# Altium PCB Dental Sensor - V200.PcbDoc
Units mm, origin at the board's own origin, x right, y up, seen from the top; angles counter-clockwise.
Board outline 58.04 x 14.5 mm, 2 copper layers (Top Layer, Bottom Layer), stack 0.287 mm thick; 21 components, 25 nets, 123 pads, 99 vias.
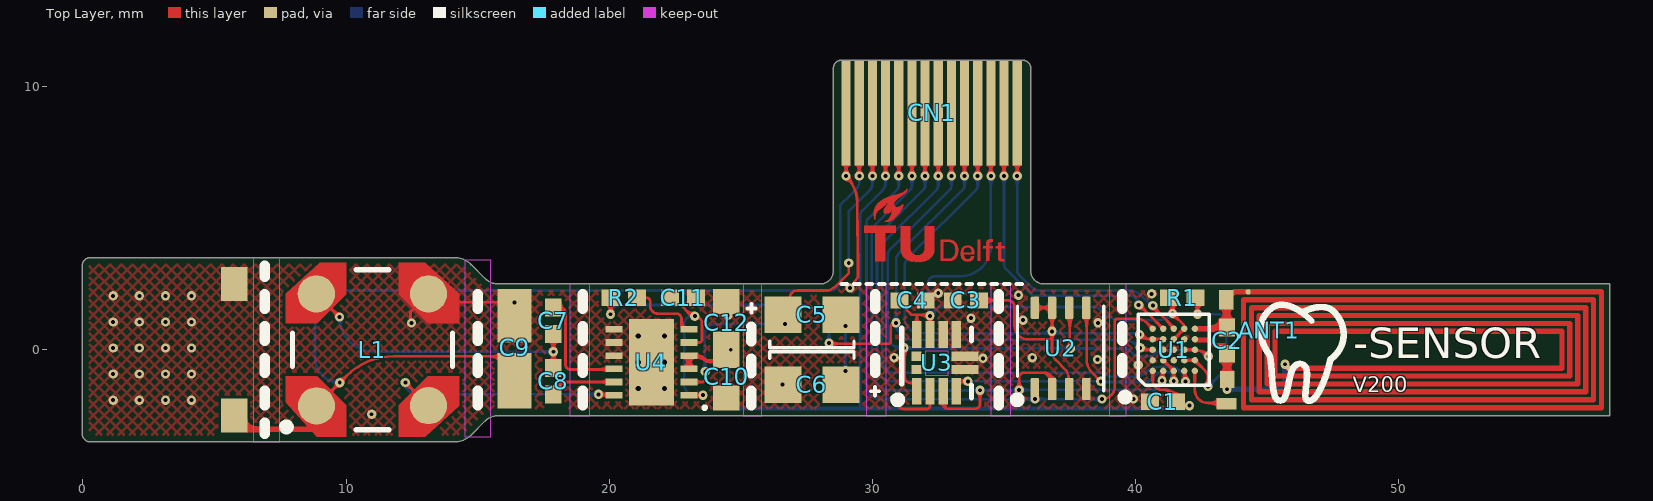
[diagram p0: Top Layer view]
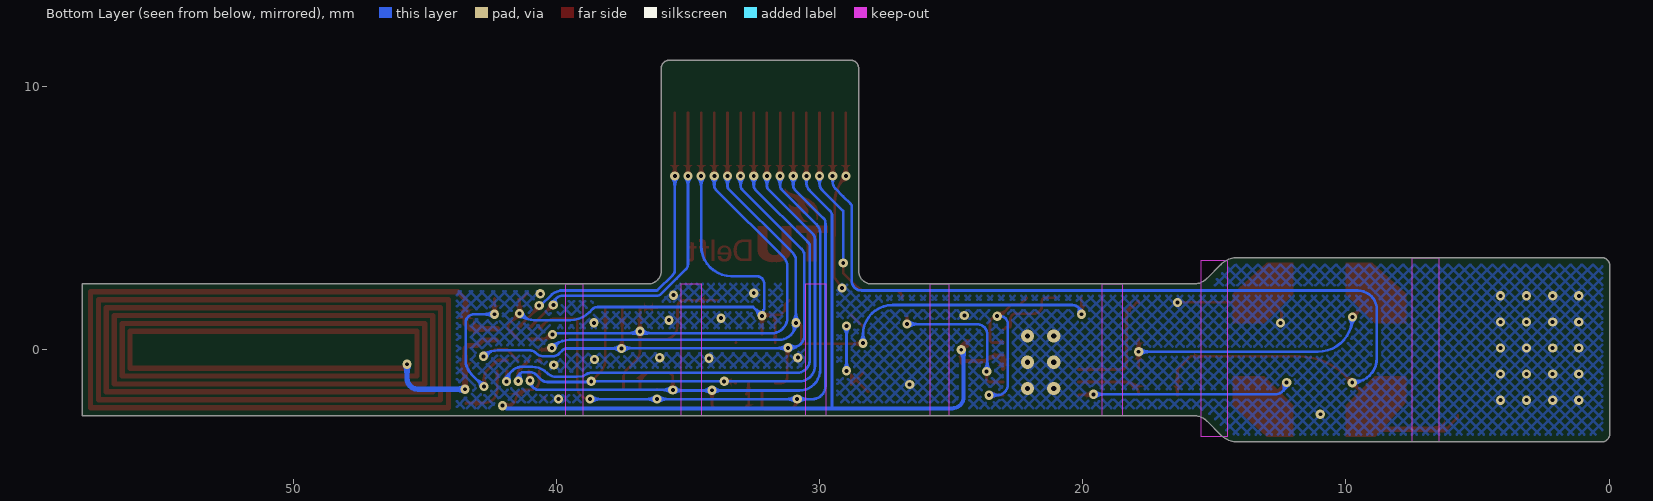
[diagram p1: Bottom Layer view, seen from below]

## Layer stack, top to bottom
Flex Stack Top Coverlay: solder mask 0.05, FC-001, Dk 4
Top Layer: signal copper 0.018
Core: core 0.051, Core-025, Dk 4.6
Bottom Layer: signal copper 0.018
Flex Stack Bottom Coverlay: solder mask 0.05, FC-001, Dk 4
Stiffener 1: core 0.2, Core-009, Dk 4.5

## Board outline
0.266,-3.5 14.116,-3.5 ccw(c14.116,-2.595) 14.756,-3.235 15.278,-2.712 cw(c15.791,-3.224) 15.791,-2.5 58.016,-2.5 58.016,2.5 36.516,2.5 cw(c36.516,3) 36.016,3 36.016,10.691 ccw(c35.716,10.7) 35.725,11 28.825,11 ccw(c28.816,10.7) 28.516,10.709 28.516,3 cw(c28.016,3) 28.016,2.5 15.791,2.5 cw(c15.791,3.224) 15.278,2.712 14.756,3.235 ccw(c14.116,2.595) 14.116,3.5 0.266,3.5 ccw(c0.275,3.2) -0.025,3.191 -0.025,-3.191 ccw(c0.275,-3.2)

## Design rules (kind name [scope] priority, off if disabled: settings)
BoardOutlineClearance "Edge Connector" [HasFootprint('52745-1297') or HasFootprint('52745-1497') or HasFootprint('52745-1697')] p1: gap=0 ignorepadtopadclearanceinfootprint=FALSE
BoardOutlineClearance [All] p2: gap=0.2 ignorepadtopadclearanceinfootprint=FALSE
Clearance Clearance_Testpad [InComponent('TP*')] p1: gap=0.1 ignorepadtopadclearanceinfootprint=FALSE except(0.06: Arc-SMDPad Track-SMDPad SMDPad-SMDPad)
Clearance [All] p2: gap=0.1 ignorepadtopadclearanceinfootprint=FALSE
ComponentClearance [InComponent('TP*')] p1: gap=0 collisioncheckmode=3 verticalgap=0.15 showdistances=FALSE
ComponentClearance ComponentClearance_1 [All] p2: gap=0.15 collisioncheckmode=3 verticalgap=0.15 showdistances=FALSE
DiffPairsRouting [All] p1: maxlimit=0.254 minlimit=0.254 mostfreqgap=0.254 toplayer_minwidth=0.381 toplayer_maxwidth=0.381 toplayer_prefwidth=0.381 bottomlayer_minwidth=0.381 bottomlayer_maxwidth=0.381 bottomlayer_prefwidth=0.381 substack1={9C96DA8B-F9AD-4D0B-9D00-B80C23C507E5} toplayer_{9c96da8b-f9ad-4d0b-9d00-b80c23c507e5}_minwidth=0.381 toplayer_{9c96da8b-f9ad-4d0b-9d00-b80c23c507e5}_maxwidth=0.381 toplayer_{9c96da8b-f9ad-4d0b-9d00-b80c23c507e5}_prefwidth=0.381 bottomlayer_{9c96da8b-f9ad-4d0b-9d00-b80c23c507e5}_minwidth=0.381 bottomlayer_{9c96da8b-f9ad-4d0b-9d00-b80c23c507e5}_maxwidth=0.381 bottomlayer_{9c96da8b-f9ad-4d0b-9d00-b80c23c507e5}_prefwidth=0.381 maxuncoupledlength=12.7
HoleSize [All] p1: absolutevalues=TRUE maxlimit=2.54 minlimit=0.15 maxpercent=80.000 minpercent=20.000
MinimumAnnularRing [All] p1: minimumring=0.1
MinimumSolderMaskSliver BGA [HasFootprint('WLCSP25')] p1: minsoldermaskwidth=0.06
MinimumSolderMaskSliver [All] p2: minsoldermaskwidth=0.09
PolygonConnect [All] p1: connectstyle=Direct reliefconductorwidth=0.254 reliefentries=4 polygonreliefangle="90 Angle" airgapwidth=0.1
RoutingVias [All] p1: holewidth=0.15 width=0.35 viastyle="Through Hole" minholewidth=0.15 minwidth=0.35 maxholewidth=1 maxwidth=2
SilkToSolderMaskClearance [IsPad] p1: minsilkscreentomaskgap=0.2 clearancetoexposedcopper=TRUE
SolderMaskExpansion [All] p1: expansion=0.102 istentingtop=FALSE
UnRoutedNet [All] p1: checkbadconnections=TRUE
Width [All] p1: maxlimit=1 minlimit=0.06 preferedwidth=0.15 substack1={9C96DA8B-F9AD-4D0B-9D00-B80C23C507E5} minimp=50.000000 maximp=50.000000 favimp=50.000000
24 further rules are at their usual default settings.

## Components (designator, comment, footprint, x,y, rotation, side; value= is the part's Value field where it differs from the comment)
ANT1 "Antenna" "NFC Antenna" 50.775,-0.1 r0 top net-tie
C1 "0.10µF" CAPC1005X03N 41.04,-1.975 r180 top
C2 "300pF" CAPC1005X03N 43.475,0.35 r90 top
C3 "0.10µF" CAPC1005X03N 33.55,1.875 r180 top
C4 "0.10µF" CAPC1005X03N 31.525,1.875 r0 top
C5 "CPH3225A" CPH3225A 27.7,1.33 r0 top
C6 "CPH3225A" CPH3225A 27.7,-1.33 r180 top
C7 "1000pF" CAPC1005X03N 17.875,1.1 r90 top
C8 "330pF" CAPC1005X03N 17.875,-1.2 r270 top
C9 "100µF" CAPC2012X12N 16.4,0.075 r90 top
C10 "47µF" CAPC1608X12N 24.45,-1.025 r270 top
C11 "1µF" CAPC1005X03N 22.8,1.975 r0 top
C12 "47µF" CAPC1608X12N 24.45,1.025 r90 top
CN1 "FPC Connector" 52745-1497 32.25,9 r270 top locked
L1 "LPR6235-752SMRC" LPR6235 11,0 r90 top
R1 "47k" CAPC1005X03N 41.775,1.975 r0 top
R2 "47k" CAPC1005X03N 20.55,1.975 r0 top
U1 "NHS3152UK" WLCSP25 41.45,0 r90 top
U2 "CY15B104QI-20LPXC" 8-GQFN 37.15,0.05 r90 top
U3 "LIS2DW12TR" FP-LGA12-DM00170568-MFG 32.437,-0.5 r90 top
U4 "LTC3108EDE#PBF" LT-DE-12-05-08-1708_V 21.6,-0.475 r180 top

## Footprints (in the part's own frame and the unit in brackets; to place one, negate y for a bottom-side part, rotate by r counter-clockwise, add the part's x,y. Pads: shape width x height; smd on the part's side, far side on the other; paste and mask are expansions set on the pad)
8-GQFN [mm] "8-pin GQFN (3.23 × 3.28 × 0.55 mm)"
  rrect25% 0.84x0.32 smd: 1(-1.545,0.975) 2(-1.545,0.325) 3(-1.545,-0.325) 4(-1.545,-0.975) 5(1.545,-0.975) 6(1.545,-0.325) 7(1.545,0.325) 8(1.545,0.975)
  silkscreen extent -1.62,-1.64 1.62,1.64, body extent -1.62,-1.69 1.62,1.69, height 0.6
52745-1497 [mm] "Cable Side"
  rect 4x0.35 smd paste-2: 1(0,-3.25) 2(0,-2.75) 3(0,-2.25) 4(0,-1.75) 5(0,-1.25) 6(0,-0.75) 7(0,-0.25) 8(0,0.25) 9(0,0.75) 10(0,1.25) 11(0,1.75) 12(0,2.25) 13(0,2.75) 14(0,3.25)
CAPC1005X03N [mm] "Chip Capacitor, 2-Leads, Body 1,00x0,50mm, IPC Medium Density"
  rect 0.68x0.62 smd: 1(-0.5,0) 2(0.5,0)
  body extent -0.55,-0.28 0.55,0.27, height 0.3
CAPC1608X12N [mm] "Chip Capacitor, 2-Leads, Body 1,60x0,80mm, IPC Medium Density"
  rect 0.95x1 smd: 1(-0.8,0) 2(0.8,0)
  body extent -0.9,-0.5 0.9,0.5, height 1.2
CAPC2012X12N [mm] "Chip Capacitor, 2-Leads, Body 2,00x1,15mm, IPC Medium Density"
  rect 1.25x1.3 smd: 1(-0.825,0) 2(0.825,0)
  body extent -1.1,-0.63 1.1,0.63, height 1.25
CPH3225A [mm]
  rect 1.4x1.4 smd: 1(-1.1,0) 2(1.1,0)
  silkscreen extent -1.6,-1.25 1.6,-1, body extent -1.6,-1.25 1.6,1.25, height 1
FP-LGA12-DM00170568-MFG [mm]
  rect 0.375x0.35 smd paste+0 mask+0: 1(-0.763,0.75) 2(-0.763,0.25) 3(-0.763,-0.25) 4(-0.763,-0.75) 7(0.763,-0.75) 8(0.763,-0.25) 9(0.763,0.25) 10(0.763,0.75)
  rect 0.35x0.375 smd paste+0 mask+0: 5(-0.25,-0.763) 6(0.25,-0.763) 11(0.25,0.763) 12(-0.25,0.763)
  silkscreen extent -0.8,1.33 1.33,1.33, body extent -1.55,-1.55 1.55,1.55, height 0.25
LPR6235 [mm] "Coupled Inductors"
  round 1.413 smd paste+0 mask+0: 1(-2.131,2.123) 2(-2.123,-2.131) 3(2.123,-2.131) 4(2.123,2.131)
  Top Layer region: -3.3,-1 -2.1,-1 -1,-2.1 -1,-3.3 -2.125,-3.3 -3.3,-2 -3.3,-1
  Top Layer region: 3.3,-1 2.1,-1 1,-2.1 1,-3.3 2.125,-3.3 3.3,-2 3.3,-1
  Top Layer region: 3.3,1 2.1,1 1,2.1 1,3.3 2.125,3.3 3.3,2 3.3,1
  Top Layer region: -1,3.3 -1,2.1 -2.1,1 -3.3,1 -3.3,2.125 -2,3.3 -1,3.3
  silkscreen extent -3.04,-3.04 3.04,3.04, body extent -3.4,-3.4 3.4,3.4, height 0.25
LT-DE-12-05-08-1708_V [mm] "SON, 12-Leads, Body 4x3mm, Pitch 0.5mm, Thermal Pad 3.3x1.7mm"
  rect 0.65x0.25 smd mask+0.08: 1(-1.425,1.25) 2(-1.425,0.75) 3(-1.425,0.25) 4(-1.425,-0.25) 5(-1.425,-0.75) 6(-1.425,-1.25) 7(1.425,-1.25) 8(1.425,-0.75) 9(1.425,-0.25) 10(1.425,0.25) 11(1.425,0.75) 12(1.425,1.25)
  rect 1.7x3.3 smd mask+0.08: 13(0,0)
  body extent -1.5,-2 1.5,2, height 0.8
"NFC Antenna" [mm] "4.5 x 15 mm"
  round 0.2 smd paste-2 mask+0.102: 1(-6.5,2.3) 2(-4.95,-0.6)
  Top Layer lines w0.2: -6.5,2.3 6.925,2.3 6.925,-2.1 -6.675,-2.1 -6.675,2 6.625,2 6.625,-1.8 -6.375,-1.8 -6.375,1.7 6.325,1.7 6.325,-1.5 -6.075,-1.5 -6.075,1.4 6.025,1.4 6.025,-1.175 ; -4.95,-0.6 5.425,-0.6 5.425,0.8 -5.475,0.8 -5.475,-0.9 5.725,-0.9 5.725,1.1 -5.775,1.1 -5.775,-1.2 6.025,-1.2
WLCSP25 [mm]
  round 0.24 smd paste+0.018 mask+0.04: A1(-0.8,0.8) A2(-0.4,0.8) A3(0,0.8) A4(0.4,0.8) A5(0.8,0.8) B1(-0.8,0.4) B2(-0.4,0.4) B3(0,0.4) B4(0.4,0.4) B5(0.8,0.4) C1(-0.8,0) C2(-0.4,0) C3(0,0) C4(0.4,0) C5(0.8,0) D1(-0.8,-0.4) D2(-0.4,-0.4) D3(0,-0.4) D4(0.4,-0.4) D5(0.8,-0.4) E1(-0.8,-0.8) E2(-0.4,-0.8) E3(0,-0.8) E4(0.4,-0.8) E5(0.8,-0.8)
  silkscreen extent -1.35,-1.35 1.35,1.35, body extent -1.27,-1.27 1.27,1.27, height 0.54

## Part data
ANT1: library part "NFC Antenna", "Track 0.2; Gap 0.1; Height 4.6; Width 14.5;"
C1 C3 C4: library part GRM155R60J104KA01D, "CAP CER 0.1UF 6.3V X5R 0402", Digi-Key Part Number=490-6287-1-ND, Manufacturer="Murata Electronics North America", Operating Temperature="-55°C ~ 85°C", Package / Case="0402 (1005 Metric)", Ratings=-, Temperature Coefficient=X5R, Tolerance=±10%, Voltage=6.3V, @ qty=0, Applications="General Purpose", Datasheets=http://www.murata.com/~/media/webrenewal/support/library/catalog/products/capacitor/mlcc/c02e.pdf, Factory Stock=0, Features=-, Height - Seated (Max)=-, Image=//media.digikey.com/Renders/Murata%20Renders/ZRB-SERIES-0402.jpg, Lead Spacing=-, Minimum Quantity=1, Mounting Type="Surface Mount, MLCC", Packaging="Cut Tape (CT)", Part Number=GRM155R60J104KA01D, Part Status=Active, Quantity Available=356062, Series=GRM, Size / Dimension="0.039\" L x 0.020\" W (1.00mm x 0.50mm)", Thickness (Max)="0.022\" (0.55mm)", Unit Price (USD)=0.1
C2: library part GRM1555C1H301JA01D, "CAP CER 300PF 50V NP0 0402", Digi-Key Part Number=490-3234-1-ND, Manufacturer="Murata Electronics North America", Operating Temperature="-55°C ~ 125°C", Package / Case="0402 (1005 Metric)", Ratings=-, Temperature Coefficient="C0G, NP0", Tolerance=±5%, Voltage=50V, @ qty=0, Applications="General Purpose", Datasheets=http://www.murata.com/~/media/webrenewal/support/library/catalog/products/capacitor/mlcc/c02e.pdf, Factory Stock=0, Features=-, Height - Seated (Max)=-, Image=//media.digikey.com/Renders/Murata%20Renders/ZRB-SERIES-0402.jpg, Lead Spacing=-, Lead Style=-, Minimum Quantity=1, Mounting Type="Surface Mount, MLCC", Packaging="Cut Tape (CT)", Part Number=GRM1555C1H301JA01D, Part Status=Active, Quantity Available=73694, Series=GRM, Size / Dimension="0.039\" L x 0.020\" W (1.00mm x 0.50mm)", Thickness (Max)="0.022\" (0.55mm)", Unit Price (USD)=0.1
C5 C6: "Supercapacitors / Ultracapacitors Reflow EDLC 3.3V, 11mF, 160 Ohm"
C7: library part GRM155R61C102KA01D, "CAP CER 1000PF 16V X5R 0402", Digi-Key Part Number=490-6308-1-ND, Manufacturer="Murata Electronics North America", Operating Temperature="-55°C ~ 85°C", Package / Case="0402 (1005 Metric)", Ratings=-, Temperature Coefficient=X5R, Tolerance=±10%, Voltage=16V, @ qty=0, Applications="General Purpose", Datasheets=http://www.murata.com/~/media/webrenewal/support/library/catalog/products/capacitor/mlcc/c02e.pdf, Factory Stock=0, Features=-, Height - Seated (Max)=-, Image=//media.digikey.com/Renders/Murata%20Renders/ZRB-SERIES-0402.jpg, Lead Spacing=-, Minimum Quantity=1, Mounting Type="Surface Mount, MLCC", Packaging="Cut Tape (CT)", Part Number=GRM155R61C102KA01D, Part Status=Active, Quantity Available=57479, Series=GRM, Size / Dimension="0.039\" L x 0.020\" W (1.00mm x 0.50mm)", Thickness (Max)="0.022\" (0.55mm)", Unit Price (USD)=0.1
C8: library part GRM155R71H331KA01J, "CAP CER 330PF 50V X7R 0402", Digi-Key Part Number=490-11424-1-ND, Manufacturer="Murata Electronics North America", Operating Temperature="-55°C ~ 125°C", Package / Case="0402 (1005 Metric)", Ratings=-, Temperature Coefficient=X7R, Tolerance=±10%, Voltage=50V, @ qty=0, Applications="General Purpose", Datasheets=http://www.murata.com/~/media/webrenewal/support/library/catalog/products/capacitor/mlcc/c02e.pdf, Factory Stock=0, Features=-, Height - Seated (Max)=-, Image=//media.digikey.com/Renders/Murata%20Renders/ZRB-SERIES-0402.jpg, Lead Spacing=-, Lead Style=-, Minimum Quantity=1, Mounting Type="Surface Mount, MLCC", Packaging="Cut Tape (CT)", Part Number=GRM155R71H331KA01J, Part Status=Active, Quantity Available=47870, Series=GRM, Size / Dimension="0.039\" L x 0.020\" W (1.00mm x 0.50mm)", Thickness (Max)="0.022\" (0.55mm)", Unit Price (USD)=0.1
C9: library part GRM21BC80E107ME15L, "CAP CER 100UF 2.5V X6S 0805", Digi-Key Part Number=490-13977-1-ND, Manufacturer="Murata Electronics North America", Operating Temperature="-55°C ~ 105°C", Package / Case="0805 (2012 Metric)", Ratings=-, Temperature Coefficient=X6S, Tolerance=±20%, Voltage=2.5V, @ qty=0, Applications="General Purpose", Datasheets=http://search.murata.co.jp/Ceramy/image/img/A01X/G101/ENG/GRM21BC80E107ME15-01.pdf, Factory Stock=0, Features=-, Height - Seated (Max)=-, Image=//media.digikey.com/Renders/Murata%20Renders/0805%20(2012%20Metric)%20.85mm.jpg, Lead Spacing=-, Lead Style=-, Minimum Quantity=1, Mounting Type="Surface Mount, MLCC", Packaging="Cut Tape (CT)", Part Number=GRM21BC80E107ME15L, Part Status=Active, Quantity Available=5990, Series=GRM, Size / Dimension="0.079\" L x 0.049\" W (2.00mm x 1.25mm)", Thickness (Max)="0.057\" (1.45mm)", Unit Price (USD)=2.17
C10 C12: library part GRJ155R60J106ME11D, "CAP CER 47UF 6.3V X5R 0603", Digi-Key Part Number=490-13211-1-ND, Manufacturer="Murata Electronics North America", Operating Temperature="-55°C ~ 85°C", Package / Case=0603, Ratings=-, Temperature Coefficient=X5R, Tolerance=±20%, Voltage=6.3V, @ qty=0, Applications="Boardflex Sensitive", Datasheets=http://psearch.en.murata.com/capacitor/product/GRJ155R60J106ME11%23.pdf, Factory Stock=0, Features="Derating Recommended, Soft Termination", Height - Seated (Max)=-, Image=//media.digikey.com/Renders/Murata%20Renders/ZRB-SERIES-0402.jpg, Lead Spacing=-, Lead Style=-, Minimum Quantity=1, Mounting Type="Surface Mount, MLCC", Packaging="Cut Tape (CT)", Part Number=GRJ155R60J106ME11D, Part Status=Active, Quantity Available=64064, Series=GRJ, Size / Dimension="0.039\" L x 0.020\" W (1.00mm x 0.50mm)", Thickness (Max)="0.028\" (0.70mm)", Unit Price (USD)=0.23
C11: library part GRT155R61C105KE01D, "CAP CER 1UF 16V X5R 0402", Digi-Key Part Number=490-12255-1-ND, Manufacturer="Murata Electronics North America", Operating Temperature="-55°C ~ 85°C", Package / Case="0402 (1005 Metric)", Ratings=AEC-Q200, Temperature Coefficient=X5R, Tolerance=±10%, Voltage=16V, @ qty=0, Applications=Automotive, Datasheets=http://search.murata.co.jp/Ceramy/image/img/A01X/G101/ENG/GRT155R61C105KE01-01.pdf, Factory Stock=0, Features=-, Height - Seated (Max)=-, Image=//media.digikey.com/Renders/Murata%20Renders/ZRB-SERIES-0402.jpg, Lead Spacing=-, Lead Style=-, Minimum Quantity=1, Mounting Type="Surface Mount, MLCC", Packaging="Cut Tape (CT)", Part Number=GRT155R61C105KE01D, Part Status=Active, Quantity Available=10000, Series=GRT, Size / Dimension="0.039\" L x 0.020\" W (1.00mm x 0.50mm)", Thickness (Max)="0.022\" (0.55mm)", Unit Price (USD)=0.1
CN1: library part 52745-1497, "FFC / FPC Board Connector, 0.5 mm, 14 Contacts, Receptacle, Easy-On 52745, Surface Mount, Top"
L1: "Gekoppelde smoorspoelen 7.5uH 75% 1.6A 316 Ohms 1:100"
R1 R2: library part ERJ-2RKF4702X, "RES SMD 47K OHM 1% 1/10W 0402", Digi-Key Part Number=P47.0KLCT-ND, Manufacturer="Panasonic Electronic Components", Operating Temperature="-55°C ~ 155°C", Package / Case="0402 (1005 Metric)", Power (Watts)="0.1W, 1/10W", Supplier Device Package=0402, Temperature Coefficient=±100ppm/°C, Tolerance=±1%, @ qty=1500, Composition="Thick Film", Datasheets=http://industrial.panasonic.com/www-cgi/jvcr13pz.cgi?E+PZ+3+AOA0002+ERJ2RKF4702X+7+WW, Factory Stock=0, Failure Rate=-, Features="Automotive AEC-Q200", Height - Seated (Max)="0.016\" (0.40mm)", Image=//media.digikey.com/Photos/Panasonic%20Photos/ERJ-PA2-Series.jpg, Minimum Quantity=1, Number of Terminations=2, Packaging="Cut Tape (CT)", Part Number=ERJ-2RKF4702X, Part Status=Active, Quantity Available=230515, Series=ERJ, Size / Dimension="0.039\" L x 0.020\" W (1.00mm x 0.50mm)", Unit Price (USD)=0.00496
U1: "ARM-microcontrollers - MCU NTAG NHS3152 NFC"
U2: "FRAM (Ferroelectric RAM) Memory IC 4Mbit SPI 20 MHz 8-GQFN (3.23x3.28)"
U3: library part CMP-12175-000006-1, "ACCEL 2-16G I2C/SPI 12LGA", Manufacturer=STMicroelectronics, Max Supply Voltage=3.6V, Min Supply Voltage=1.62V, Operating Supply Current=0.38-90uA, Package=LGA12-DM00170568, Temperature="-40°C to +85°C", Temperature Range High=+85°C, Temperature Range Low=-40°C, Accel Range=2/4/8/16g, Accel Resolution=14bits, Automotive=No, Category=IC, ComponentLink2Description=Datasheet, ComponentLink2URL=https://www.st.com/resource/en/datasheet/lis2dw12.pdf, Device Class L1=Sensors, Device Class L2="Motion Sensors", Device Class L3=Accelerometers, Digikey Description="ACCEL 2-16G I2C/SPI 12LGA", Footprint Url=https://www.st.com/content/ccc/resource/technical/document/technical_note/73/17/9c/16/dd/96/4a/01/CD00134799.pdf/files/CD00134799.pdf/jcr:content/translations/en.CD00134799.pdf, Height=0.7mm, Lead Free=Yes, Manufacturer Part Number=LIS2DW12TR, Mouser Description="Accelerometer Triple ±2g/±4g/±8g/±16g 1.62V to 3.6V 0.244mg/digit/0.488mg/digit/0.976mg/digit/1.952mg/digit 12-Pin LG...", Octopart=https://octopart.com/lis2dw12tr-stmicroelectronics-77080925, RoHS=TRUE, Sensor Output=I2C,SPI
U4: library part CMP-0473-00079-1, "Ultralow Voltage Step-Up Converter and Power Manager, 12-pin SON (DE-12), -40 to 125 degC, Pb-Free", Manufacturer="Linear Technology", Code_JEDEC=MO-229, ComponentLink1Description="Manufacturer URL", ComponentLink1URL=http://www.linear.com/, ComponentLink2Description=Datasheet, ComponentLink2URL=http://cds.linear.com/docs/en/datasheet/3108fb.pdf, ComponentLink3Description="Package Specification", ComponentLink3URL=http://cds.linear.com/docs/en/datasheet/3473f.pdf, DatasheetVersion="Rev. B", Energy Source=Thermoelectric, Mounting Technology="Surface Mount", Number of Outputs=3, PackageDescription="12-Pin Plastic DFN, Body 4 x 3 mm, Pitch 0.5 mm", PackageReference=DE-12, PartNumber=LTC3108EDE#PBF, RoHS=TRUE, Topology="Boost, LDO", Vin Max(V)=0.5, Vin Min(V)=0.02, Vout Max(V)=5

## Free pads (board coordinates)
  rect 0.35x1 smd paste-1 mask+0: 1(31.687,-1.575) 1(31.687,0.588) 1(32.187,-1.575) 1(32.187,0.588) 1(32.687,-1.587) 1(32.687,0.588) 1(33.188,-1.587) 1(33.188,0.588)
  rect 1x0.35 smd paste-1 mask+0: 1(33.525,-0.75) 1(33.525,-0.25)
  rect 1x1.3 smd paste-1: 2(5.75,-2.5) 2(5.75,2.5)
  rect 1.3x1 smd paste-1: 2(16.4,-1.725) 2(16.4,1.8)
  rect 0.75x0.45 smd paste-1: 3(43.45,-2.05)
  rect 0.55x0.75 smd paste-1: 3(43.45,1.9)
  rect 0.55x0.65 smd paste-1: 3(43.475,-1.125)

## Via types
v1: diameter 0.35, hole 0.15, Top Layer to Bottom Layer, tented both sides, 93 vias
v2: diameter 0.5, hole 0.2, Top Layer to Bottom Layer, tented both sides, 6 vias

## Nets (pads, with @x,y where several pads share a name; then routed paths per layer and width w, separated by ;. In a path a pad name is that pad's centre, name@x,y a point inside that pad or via, vN(x,y) a via of type N, cw(c..) or ccw(c..) an arc to the next point about the centre after c; other vN are vias at no path point)
AN0_0: pad.3@43.45,-2.05 U1.E1 | length 2.2
  Top Layer w0.1: U1.E1 42.25,-1.525 ccw(c42.75,-1.525) 42.75,-2.025 43.425,-2.025 cw(c43.425,-2.05) pad.3@43.45,-2.05
C1: C7.2 U4.10 | length 4.6
  Top Layer w0.1: C7.2@17.875,1.764 C7.2@17.875,1.775 ; C7.2@17.875,1.864 18.135,1.604 cw(c18.135,1.404) 18.335,1.404 18.335,-0.56 ccw(c18.525,-0.56) 18.525,-0.75 U4.10@20.175,-0.75
C2: C8.2 U4.11 | length 2.6
  Top Layer w0.1: C8.2 cw(c18.35,-1.7) 18.35,-1.225 U4.11
CS: CN1.5 pad.1@32.187,-1.575 U1.A5 U2.1 U3.2 | length 27.2
  Top Layer w0.1: v1(30.85,-1.875) 30.85,-1.887 ccw(c31.213,-1.887) 31.213,-2.25 32.075,-2.25 ccw(c32.075,-2.137) 32.187,-2.137 pad.1@32.187,-1.575 ; v1(31,6.6) CN1.5 ; v1(38.725,-1.875) ccw(c38.725,-1.389) 39.211,-1.389 39.211,-1.381 39.211,1.116 39.241,1.146 39.27,1.175 40.05,1.175 cw(c40.05,0.632) 40.434,1.016 U1.A5 U1.A5@40.65,0.81
  Bottom Layer w0.1: 29.863,5.013 ccw(c30.077,4.8) 29.775,4.8 29.775,-1.377 ccw(c30.273,-1.377) 30.273,-1.875 v1(30.85,-1.875) v1(36.175,-1.875) v1(38.725,-1.875) ; 29.863,5.013 30.947,6.097 ccw(c30.819,6.225) 31,6.225 v1(31,6.6)
GND: C1.2 C3.2 C4.2 C6.2 C9.2 C10.2 C11.2 C12.2 CN1.1 L1.3 pad.1@32.687,0.588 pad.1@33.188,0.588 pad.1@33.525,-0.25 pad.1@33.525,-0.75 pad.2@5.75,2.5 pad.2@16.4,1.8 U1.A2 U1.B3 U1.C3 U1.D4 U2.4 U3.5 U3.6 U3.7 U3.8 U4.7 U4.8 U4.9 U4.13 | length 11.9
  Top Layer w0.1: v1(12.48,1.012) 12.448,1.044 12.448,1.44 L1.3 13.487,2.123 13.81,1.8 v1(16.4,1.8) ; CN1.1 v1(29,6.6) cw(c27.974,5.574) 29.425,5.574 29.45,3.036 29.45,2.766 v1(29.15,2.35) ; pad.1@33.175,0.275 U3.7 ; C1.2@40.425,-1.875 40.45,-1.85 C1.2@40.45,-1.8
  Top Layer w0.2: v1@40.1,-0.6 v1@40.15,-0.55 ; v1(40.1,-0.575) v1@40.141,-0.575 ; U1.A2@40.632,-0.408 U1.A2@40.639,-0.4
  other v1: 10.973,-2.45 1.15,-1.917 2.142,-1.917 3.133,-1.917 4.125,-1.917 39.925,-1.875 26.575,-1.325 1.15,-0.925 2.142,-0.925 3.133,-0.925 4.125,-0.925 38.55,-0.375 34.2,-0.325 30.825,-0.3 36.075,-0.3 1.15,0.067 2.142,0.067 3.133,0.067 4.125,0.067 38.575,1.025 1.15,1.058 2.142,1.058 3.133,1.058 4.125,1.058 35.725,1.125 33.75,1.2 24.5,1.3 1.15,2.05 2.142,2.05 3.133,2.05 4.125,2.05 35.55,2.075 40.611,2.125 32.5,2.15
  other v2: 21.1,-1.475 22.1,-1.475 21.1,-0.475 22.1,-0.475 21.1,0.525 22.1,0.525
MISO: CN1.6 pad.1@32.687,-1.587 U1.B1 U2.2 U3.3 | length 27.8
  Top Layer w0.1: v1(31.5,6.6) CN1.6 ; U3.3 32.7,-1.275 pad.1@32.7,-1.587 ; pad.1@32.787,-1.687 32.687,-1.587 32.687,-2.076 ccw(c32.849,-2.076) 32.849,-2.237 33.912,-2.237 ccw(c33.912,-2.062) 34.088,-2.062 v1(34.088,-1.537) ; v1(35.575,-1.525) 35.575,-1.054 cw(c35.754,-1.054) 35.754,-0.875 36.55,-0.875 cw(c36.55,-1.15) 36.825,-1.15 U2.2 ; v1(41,-1.175) 41.025,-1.15 41.025,-0.825 U1.B1
  Bottom Layer w0.1: v1(31.5,6.6) 31.5,6.225 cw(c31.319,6.225) 31.447,6.097 30.116,4.766 ccw(c30.458,4.425) 29.975,4.425 29.975,-0.75 ccw(c30.775,-0.75) 30.775,-1.55 35.55,-1.55 v1(35.575,-1.525) 40.65,-1.525 ccw(c40.65,-1.175) v1(41,-1.175)
MOSI: CN1.7 pad.1@33.188,-1.587 U1.B2 U1.C1 U2.5 U3.4 | length 26.8
  Top Layer w0.1: v1(32,6.6) CN1.7 ; U3.4 33.188,-1.275 33.262,-1.2 v1(33.625,-1.2) ; U2.5 38.138,1.583 38.138,-0.375 ccw(c38.832,-0.375) 38.341,-0.866 v1(38.675,-1.2) ; U1.B2@41.023,-0.373 U1.C1 v1(41.45,-1.194)
  Bottom Layer w0.1: v1(32,6.6) 32,6.225 cw(c31.819,6.225) 31.947,6.097 30.263,4.413 ccw(c30.477,4.2) 30.175,4.2 30.175,-0.6 ccw(c30.775,-0.6) 30.775,-1.2 v1(38.675,-1.2) 38.7,-1.225 40.35,-1.225 ccw(c40.35,-0.885) 40.59,-1.125 40.783,-0.933 40.796,-0.922 cw(c41,-1.175) 41,-0.85 41.25,-0.85 cw(c41.25,-1.05) 41.45,-1.05 v1(41.45,-1.194)
NetANT1_1: ANT1.1 C2.2 pad.3@43.45,1.9 U1.E5 | length 3.1
  Top Layer w0.2: U1.E5 43.275,0.8 43.45,0.975 43.45,1.9 43.75,2.2 ANT1.1
NetANT1_2: ANT1.2 C2.1 pad.3@43.475,-1.125 U1.E4 | length 6
  Top Layer w0.2: U1.E4@42.287,0.375 42.8,0.375 43.017,0.158 43.367,0.158 C2.1@43.475,0.05 ; v1(43.475,-1.5) C2.1@43.475,-0.025 ; v1(45.675,-0.55) ccw(c45.825,-0.55) ANT1.2
  Bottom Layer w0.2: v1(43.475,-1.5) 45.258,-1.5 ccw(c45.258,-1.083) 45.675,-1.083 v1(45.675,-0.55)
NetC5_2: C5.2 C6.1 | length 4.3
  Top Layer w0.1: C6.1@28.15,-1.6 C6.1@28.61,-1.14 ; C6.1@28.35,-0.88 C6.1@28.61,-1.14 ; C5.2@28.35,0.88 C5.2 ; C6.1@28.61,-1.14 28.8,-0.95 C6.1 C6.1@28.61,-1.14
  Bottom Layer w0.1: v1(28.975,-0.8) v1(28.975,0.9)
NetC7_1: C7.1 C8.1 L1.4 | length 11.2
  Top Layer w0.1: L1.4 v1(9.75,1.242) ; C8.1 v1(17.875,-0.075) C7.1@17.875,0.425
  Bottom Layer w0.1: v1(9.75,1.242) ccw(c11.067,1.242) 11.067,-0.075 v1@17.852,-0.075
NetR2_2: R2.2 U4.6 | length 2.7
  Top Layer w0.1: R2.2 21.425,1.975 cw(c21.425,1.85) 21.55,1.85 21.55,1.675 ccw(c21.85,1.675) 21.85,1.375 22.541,1.375 cw(c22.541,1.167) 22.749,1.167 ; 22.749,1.166 22.749,0.876 22.764,0.85 U4.6@22.775,0.85 ; U4.6@22.924,0.85 22.999,0.775 U4.6
P+: C9.1 CN1.2 L1.1 pad.2@5.75,-2.5 pad.2@16.4,-1.725 | length 44.3
  Top Layer w0.1: pad.2@5.75,-2.5 5.75,-2.575 pad.2@6.2,-3.025 ; 8.875,-3.025 8.877,-3.023 L1.1 v1(9.758,-1.25) 10.014,-0.994 cw(c11.81,-2.79) 11.81,-0.25 15.9,-0.25 C9.1 pad.2@16.4,-1.725 ; v1(29.5,6.6) CN1.2
  Top Layer w0.2: pad.2@6.2,-3.025 8.875,-3.025
  Bottom Layer w0.1: v1(9.758,-1.25) cw(c9.758,-0.317) 8.825,-0.317 8.825,1.525 cw(c9.55,1.525) 9.55,2.25 28.405,2.25 ccw(c28.405,2.62) 28.775,2.62 28.775,5.43 cw(c28.952,5.43) 28.827,5.555 29.101,5.83 29.397,6.125 ccw(c29.146,6.375) 29.5,6.375 v1(29.5,6.6) ccw(c29.56,6.54) v1@29.475,6.54
PRE_CHARGE: R1.2 U1.D2 U1.E2 | length 6.2
  Top Layer w0.1: U1.D2 U1.E2 42.638,-0.787 cw(c42.366,-1.059) 42.75,-1.059 v1(42.75,-1.4) ; v1(42.35,1.35) R1.2@42.35,1.95
  Bottom Layer w0.1: v1(42.35,1.35) 43.125,1.35 cw(c43.125,1.025) 43.45,1.025 43.45,-0.4 cw(c42.726,-0.4) 43.238,-0.912 v1(42.75,-1.4)
RESET: CN1.10 R2.1 U1.A3 | length 32.6
  Top Layer w0.1: v1(20.05,1.35) R2.1 ; v1(28.35,0.25) 28.375,0.225 30.6,0.225 ccw(c30.6,0.325) 30.7,0.325 30.7,0.866 cw(c30.859,0.866) 30.859,1.025 v1(30.9,1.025) ; v1(33.5,6.6) CN1.10 ; v1(40.175,0.075) 40.243,0.075 40.318,0 U1.A3
  Bottom Layer w0.1: v1(20.05,1.35) cw(c20.4,1.35) 20.4,1.7 27.225,1.7 cw(c27.225,0.575) 28.35,0.575 v1(28.35,0.25) ; v1(33.5,6.6) 33.5,6.225 cw(c33.319,6.225) 33.447,6.097 30.999,3.649 ccw(c31.237,3.41) 30.9,3.41 v1(30.9,1.025) ccw(c31.55,1.025) 31.55,0.375 39.5,0.375 cw(c39.5,-0.53) 40.14,0.11 v1(40.175,0.075)
SCLK: CN1.9 pad.1@31.687,-1.575 U1.C2 U1.D3 U1.E3 U2.6 U3.1 | length 27
  Top Layer w0.1: v1(31.2,0.075) 31.225,0.05 31.225,-1.037 ccw(c31.45,-1.037) 31.45,-1.262 U3.1 ; v1(33,6.6) CN1.9 ; U2.6 37.5,1.57 37.5,0.075 v1(37.525,0.05) ; U1.C2 41.468,-0.4 41.85,-0.018 U1.D3 ; U1.D3@41.854,0 U1.E3 cw(c42.25,-0.664) 42.719,-0.194 v1(42.775,-0.25)
  Bottom Layer w0.1: v1(33,6.6) 33,6.225 cw(c32.819,6.225) 32.947,6.097 30.681,3.831 ccw(c30.937,3.575) 30.575,3.575 30.575,0.566 ccw(c31.066,0.566) 31.066,0.075 v1(31.2,0.075) 31.212,0.063 37.512,0.063 v1(37.525,0.05) 39.6,0.05 cw(c39.6,-0.191) 39.771,-0.021 39.9,-0.15 ccw(c40.141,0.091) 40.141,-0.25 40.473,-0.25 ccw(c40.473,0.177) 40.775,-0.125 cw(c41.016,-0.366) 41.016,-0.025 42.232,-0.025 cw(c42.232,-0.793) v1(42.775,-0.25)
SW: L1.2 U4.12 | length 9.5
  Top Layer w0.1: v1(12.25,-1.242) L1.2 ; v1(19.591,-1.694) 19.607,-1.71 20.135,-1.71 U4.12@20.175,-1.75
  Bottom Layer w0.1: v1(12.25,-1.242) ccw(c12.702,-1.242) 12.702,-1.694 v1(19.591,-1.694)
SWCLK: CN1.13 U1.B5 | length 13
  Top Layer w0.1: v1(35,6.6) CN1.13 ; v1(40.117,1.7) 40.146,1.7 41.046,0.8 U1.B5
  Bottom Layer w0.1: v1(35,6.6) 35,3.25 ccw(c35.26,3.25) 35.076,3.066 35.433,2.709 36.019,2.123 ccw(c36.162,2.263) 36.052,2.096 ccw(c36.215,2.348) 36.25,2.05 39.767,2.05 cw(c39.767,1.7) v1(40.117,1.7) ; v1@40.13,1.62 v1@40.13,1.687
SWDIO: CN1.14 U1.C5 | length 12.9
  Top Layer w0.1: v1(35.5,6.6) CN1.14 ; v1(40.654,1.677) 40.654,1.633 41.45,0.837 U1.C5
  Bottom Layer w0.1: v1(35.5,6.6) 35.5,3.031 ccw(c35.756,3.031) 35.575,2.85 36.162,2.263 ccw(c36.215,2.348) 36.226,2.249 cw(c36.25,2.05) 36.25,2.25 36.497,2.25 39.85,2.25 39.928,2.226 cw(c39.767,1.7) 40.035,2.18 40.174,2.103 40.6,1.677 v1(40.654,1.677)
VACC: C4.1 CN1.12 pad.1@31.687,0.588 pad.1@32.187,0.588 R1.1 U1.C4 U1.D5 U3.9 U3.10 | length 24.5
  Top Layer w0.1: C4.1@31.15,1.875 31.312,1.713 31.312,1.5 31.425,1.388 31.425,1.384 31.484,1.325 31.687,1.325 32.153,1.325 v1(32.187,1.29) ; U3.10 31.687,0.588 31.687,1.3 ; pad.1@32.187,0.588 v1@32.187,1.325 ; v1(34.5,6.6) CN1.12 ; R1.1@41.1,2.15 R1.1 ; R1.1@41.375,1.917 41.438,1.917 41.4,1.879 v1(41.4,1.375) 41.652,1.123 41.823,0.952 41.823,0.827 U1.D5 U1.C4
  Bottom Layer w0.1: v1(32.187,1.29) 32.14,1.338 32.14,1.504 32.1,1.544 32.1,2.5 cw(c32.4,2.5) 32.4,2.8 33.35,2.8 ccw(c33.35,3.95) 34.5,3.95 v1(34.5,6.6) ; v1@32.187,1.325 32.222,1.325 32.523,1.625 38.425,1.625 cw(c38.425,1.323) 38.638,1.537 38.751,1.424 ccw(c39.473,2.147) 39.473,1.125 40.85,1.125 ccw(c40.85,1.849) 41.362,1.337 v1(41.4,1.375)
VAUX: C11.1 U4.1 U4.5 | length 7.6
  Top Layer w0.1: C11.1@22.125,1.975 22.385,1.715 22.698,1.715 23.09,1.323 23.202,1.323 v1(23.25,1.275) cw(c23.25,1) 23.525,1 23.525,0.375 cw(c23.425,0.375) 23.425,0.275 U4.5 U4.5@23.1,0.35 ; U4.1 v1(23.566,-1.725)
  Bottom Layer w0.1: v1@23.202,1.227 v1(23.25,1.275) 23.13,1.275 ccw(c23.13,0.995) 22.85,0.995 22.85,-1.325 ccw(c23.25,-1.325) 23.25,-1.725 v1(23.566,-1.725)
VDDBAT: C1.1 C10.1 C12.1 CN1.4 U1.A1 U4.3 U4.4 | length 36.6
  Top Layer w0.1: v1(30.5,6.6) CN1.4@30.5,9 ; U1.A1 40.65,-1.175 ccw(c41,-1.175) 41,-1.525 41.125,-1.525 cw(c41.125,-1.975) 41.492,-1.715 C1.1@41.575,-1.975
  Top Layer w0.15: U4.3 U4.4 23.298,-0.225 cw(c23.298,-0.652) 23.6,-0.35 ccw(c23.805,-0.145) 23.805,-0.435 C10.1@24.525,-0.435 ; C12.1@24.366,0.339 24.376,0.339 24.566,0.149 C12.1@24.566,-0.236 ; C12.1@24.391,0.139 C12.1@24.391,0.169 ; C10.1@24.591,-0.496 C12.1@24.591,-0.236 ; C12.1@24.616,-0.236 C12.1@24.616,-0.111 ; C1.1@41.6,-1.975 41.75,-2.125 v1(42.05,-2.125)
  Bottom Layer w0.1: 29.525,-2.225 29.525,5.1 cw(c29.766,5.1) 29.596,5.271 30.375,6.05 ccw(c30.073,6.352) 30.5,6.352 v1(30.5,6.6)
  Bottom Layer w0.15: v1@24.525,-0.05 24.525,-1.8 ccw(c24.95,-1.8) 24.95,-2.225 41.896,-2.225 41.996,-2.125 v1(42.05,-2.125)
  other v1: 24.616,0
VMEM: C3.1 CN1.11 U1.A4 U1.B4 U2.3 U2.7 U2.8 | length 27.3
  Top Layer w0.1: C3.1@33.875,1.875 35.15,1.875 cw(c35.15,1.625) 35.4,1.625 35.4,0.9 ccw(c35.9,0.9) 35.9,0.4 36.825,0.4 ; v1(34,6.6) CN1.11 ; U2.8 U2.7 v1(36.825,0.7) 36.825,0.4 ; U2.3 cw(c37.535,-1.435) 37.45,-1.435 37.45,-1 37.362,-0.787 36.966,-0.391 cw(c37.308,-0.05) 36.825,-0.05 36.825,0.4 ; v1@40.218,0.575 v1(40.15,0.575) ccw(c40.572,0.997) 40.572,0.4 U1.A4 U1.B4
  Bottom Layer w0.1: v1(34,6.6) 34,6.225 cw(c33.819,6.225) 33.947,6.097 31.366,3.516 ccw(c31.708,3.175) 31.225,3.175 31.225,1.225 ccw(c31.825,1.225) 31.825,0.625 v1@36.825,0.625 ; v1(36.825,0.7) v1@36.825,0.625 ; v1(40.15,0.575) 40.102,0.623 39.969,0.623 39.966,0.625 v1@36.825,0.625
VSTORE: C5.1 CN1.3 U4.2 | length 15.1
  Top Layer w0.1: U4.2 23.54,-1.225 ccw(c23.54,-1.14) 23.6,-1.2 ccw(c23.479,-1.079) 23.65,-1.079 v1(23.65,-0.825) v1@23.602,-0.873 ; v1(26.675,0.975) C5.1@26.675,1.255 ; C5.1@26.857,1.961 cw(c27.146,1.961) 27.146,2.25 28.298,2.25 ccw(c28.297,2.35) 28.314,2.251 ccw(c28.236,2.687) 28.55,2.375 29.1,2.925 v1(29.1,3.3) ; v1(30,6.6) CN1.3
  Bottom Layer w0.1: v1(23.65,-0.825) 23.625,-0.8 23.625,0.575 cw(c24.025,0.575) 24.025,0.975 v1(26.675,0.975) ; v1(29.1,3.3) 29.1,5.275 29.9,6.075 ccw(c29.659,6.316) 30,6.316 v1(30,6.6)
WAKE_UP: CN1.8 U1.D1 | length 22.9
  Top Layer w0.1: v1(32.5,6.6) CN1.8 ; U1.D1@41.863,-0.8 41.875,-0.812 41.875,-1.176 v1(41.9,-1.201)
  Bottom Layer w0.1: v1(32.5,6.6) 32.5,6.225 cw(c32.319,6.225) 32.447,6.097 30.456,4.106 ccw(c30.712,3.85) 30.384,4.004 ccw(c30.475,3.962) 30.375,3.962 30.375,-0.4 ccw(c30.85,-0.4) 30.85,-0.875 38.675,-0.875 cw(c38.675,-1.2) 38.841,-0.92 38.956,-0.989 ; 38.956,-0.989 ccw(c39.007,-0.903) 38.996,-1.002 39.225,-1.025 40.012,-1.025 ccw(c40.012,-0.548) 40.35,-0.885 cw(c40.918,-1.453) 40.918,-0.65 41.325,-0.65 cw(c41.325,-1.133) 41.666,-0.791 41.776,-0.901 cw(c41.475,-1.201) v1(41.9,-1.201) v1@41.9,-1.184
pads on no net: U3.11 U3.12

## Polygon pours and split planes (outlines as drawn)
no net on Layer0 "Default Coverlay 1 Top" (split plane): 14.205,-3.5 14.38,-3.465 14.544,-3.397 14.693,-3.298 14.756,-3.235 15.278,-2.712 15.331,-2.664 15.449,-2.586 15.58,-2.531 15.72,-2.503 15.791,-2.5 58.016,-2.5 58.016,2.5 36.516,2.5 36.418,2.51 36.238,2.584 36.1,2.722 36.025,2.902 36.016,3 36.016,10.691 36.017,10.751 35.975,10.862 35.893,10.949 35.784,10.998 35.725,11 28.825,11 28.765,11.002 28.653,10.959 28.566,10.878 28.518,10.769 28.516,10.709 28.516,3 28.506,2.902 28.431,2.722 28.293,2.584 28.113,2.51 28.016,2.5 15.791,2.5 15.72,2.503 15.58,2.531 15.449,2.586 15.331,2.664 15.278,2.712 14.756,3.235 14.693,3.298 14.544,3.397 14.38,3.465 14.205,3.5 14.116,3.5 0.266,3.5 0.206,3.498 0.097,3.449 0.015,3.362 -0.027,3.251 -0.025,3.191 -0.025,-3.191 -0.027,-3.251 0.015,-3.362 0.097,-3.449 0.206,-3.498 0.266,-3.5
no net on Layer0 "Default Coverlay 1 Bottom" (split plane): 14.205,-3.5 14.38,-3.465 14.544,-3.397 14.693,-3.298 14.756,-3.235 15.278,-2.712 15.331,-2.664 15.449,-2.586 15.58,-2.531 15.72,-2.503 15.791,-2.5 58.016,-2.5 58.016,2.5 36.516,2.5 36.418,2.51 36.238,2.584 36.1,2.722 36.025,2.902 36.016,3 36.016,10.691 36.017,10.751 35.975,10.862 35.893,10.949 35.784,10.998 35.725,11 28.825,11 28.765,11.002 28.653,10.959 28.566,10.878 28.518,10.769 28.516,10.709 28.516,3 28.506,2.902 28.431,2.722 28.293,2.584 28.113,2.51 28.016,2.5 15.791,2.5 15.72,2.503 15.58,2.531 15.449,2.586 15.331,2.664 15.278,2.712 14.756,3.235 14.693,3.298 14.544,3.397 14.38,3.465 14.205,3.5 14.116,3.5 0.266,3.5 0.206,3.498 0.097,3.449 0.015,3.362 -0.027,3.251 -0.025,3.191 -0.025,-3.191 -0.027,-3.251 0.015,-3.362 0.097,-3.449 0.206,-3.498 0.266,-3.5
GND on Bottom Layer "Bottom Ground" (hatched 45Degree grid 0.3 track 0.1, remove dead copper, pour order 3): 14.475,3.5 15.773,2.5 43.775,2.5 43.775,-2.5 15.773,-2.502 14.475,-3.419 -0.041,-3.588 -0.041,3.5
GND on Top Layer "Top ground" (hatched 45Degree grid 0.3 track 0.1, remove dead copper, pour order 1): 14.475,3.5 15.773,2.5 43.775,2.5 43.775,-2.5 15.773,-2.502 14.475,-3.419 -0.041,-3.588 -0.041,3.5

## Keep-outs
Top Layer:
  rectangle: 39,-2.5 39.65,2.5
  rectangle: 34.5,-2.5 35.25,2.5
  rectangle: 25.1,-2.5 25.8,2.5
  rectangle: 18.5,-2.5 19.25,2.5
  rectangle: 14.5,-3.3 15.5,3.4
  rectangle: 6.474,-3.5 7.474,3.5
  rectangle: 29.774,-2.5 30.524,2.5
  rectangle: 32,-0.975 32.875,-0.05
Bottom Layer:
  rectangle: 29.774,-2.5 30.524,2.5
  rectangle: 6.474,-3.5 7.474,3.5
  rectangle: 14.5,-3.3 15.5,3.4
  rectangle: 18.5,-2.5 19.25,2.5
  rectangle: 25.1,-2.5 25.8,2.5
  rectangle: 34.5,-2.5 35.25,2.5
  rectangle: 39,-2.5 39.65,2.5

## Other copper
Top Layer:
  region: 34.887,4.079 34.887,3.938 34.89,3.938 34.89,3.935 35.019,3.935 35.019,3.864 35.016,3.864 35.016,3.861 34.887,3.861 34.887,3.491 34.89,3.491 34.89,3.477 34.893,3.477 34.893,3.471 34.895,3.471 34.895,3.468 34.898,3.468 34.898,3.462 34.901,3.462 34.901,3.46 34.904,3.46 34.904,3.457 34.91,3.457 34.91,3.454 34.913,3.454 34.913,3.451 34.918,3.451 34.918,3.448 34.924,3.448 34.924,3.445 34.936,3.445 34.936,3.442 34.953,3.442 34.953,3.44 34.961,3.44 34.961,3.442 34.99,3.442 34.99,3.445 35.004,3.445 35.004,3.448 35.013,3.448 35.013,3.365 35.002,3.365 35.002,3.362 34.979,3.362 34.979,3.359 34.898,3.359 34.898,3.362 34.875,3.362 34.875,3.365 34.864,3.365 34.864,3.368 34.852,3.368 34.852,3.371 34.844,3.371 34.844,3.374 34.838,3.374 34.838,3.376 34.832,3.376 34.832,3.379 34.827,3.379 34.827,3.382 34.821,3.382 34.821,3.385 34.818,3.385 34.818,3.388 34.812,3.388 34.812,3.391 34.81,3.391 34.81,3.394 34.807,3.394 34.807,3.397 34.804,3.397 34.804,3.402 34.801,3.402 34.801,3.405 34.798,3.405 34.798,3.411 34.795,3.411 34.795,3.414 34.792,3.414 34.792,3.419 34.789,3.419 34.789,3.428 34.787,3.428 34.787,3.437 34.784,3.437 34.784,3.454 34.781,3.454 34.781,3.858 34.778,3.858 34.778,3.861 34.683,3.861 34.683,3.935 34.778,3.935 34.778,3.938 34.781,3.938 34.781,4.056 34.787,4.056 34.787,4.059 34.795,4.059 34.795,4.061 34.804,4.061 34.804,4.064 34.812,4.064 34.812,4.067 34.824,4.067 34.824,4.07 34.832,4.07 34.832,4.073 34.841,4.073 34.841,4.076 34.85,4.076 34.85,4.079 34.858,4.079 34.858,4.081 34.87,4.081 34.87,4.084 34.878,4.084 34.878,4.087 34.887,4.087 34.887,4.081
  region: 301 vertices and 1 holes, not listed, extent 32.597,3.376 33.257,4.182
  region: 495 vertices and 1 holes, not listed, extent 33.36,3.359 33.867,3.952
  region: 33.996,4.139 33.996,4.182 34.102,4.182 34.102,3.376 33.996,3.376 33.996,4.136
  region: 34.325,3.422 34.325,3.861 34.219,3.861 34.219,3.935 34.323,3.935 34.323,3.938 34.325,3.938 34.325,4.05 34.328,4.05 34.328,4.073 34.331,4.073 34.331,4.087 34.334,4.087 34.334,4.099 34.337,4.099 34.337,4.104 34.34,4.104 34.34,4.113 34.343,4.113 34.343,4.119 34.345,4.119 34.345,4.122 34.348,4.122 34.348,4.127 34.351,4.127 34.351,4.133 34.354,4.133 34.354,4.136 34.357,4.136 34.357,4.142 34.36,4.142 34.36,4.144 34.363,4.144 34.363,4.147 34.366,4.147 34.366,4.15 34.368,4.15 34.368,4.153 34.371,4.153 34.371,4.156 34.374,4.156 34.374,4.159 34.38,4.159 34.38,4.162 34.383,4.162 34.383,4.165 34.386,4.165 34.386,4.167 34.391,4.167 34.391,4.17 34.394,4.17 34.394,4.173 34.4,4.173 34.4,4.176 34.406,4.176 34.406,4.179 34.411,4.179 34.411,4.182 34.42,4.182 34.42,4.185 34.426,4.185 34.426,4.187 34.434,4.187 34.434,4.19 34.446,4.19 34.446,4.193 34.457,4.193 34.457,4.196 34.543,4.196 34.543,4.193 34.555,4.193 34.555,4.19 34.569,4.19 34.569,4.187 34.578,4.187 34.578,4.185 34.58,4.185 34.58,4.102 34.578,4.102 34.578,4.099 34.546,4.099 34.546,4.102 34.503,4.102 34.503,4.099 34.483,4.099 34.483,4.096 34.472,4.096 34.472,4.093 34.466,4.093 34.466,4.09 34.46,4.09 34.46,4.087 34.454,4.087 34.454,4.084 34.452,4.084 34.452,4.081 34.449,4.081 34.449,4.076 34.446,4.076 34.446,4.073 34.443,4.073 34.443,4.067 34.44,4.067 34.44,4.059 34.437,4.059 34.437,4.047 34.434,4.047 34.434,3.938 34.437,3.938 34.437,3.935 34.563,3.935 34.563,3.861 34.434,3.861 34.434,3.376 34.325,3.376 34.325,3.419
  region: 1200 vertices and 0 holes, not listed, extent 30.051,4.859 31.325,6.118
  region: 30.104,3.904 30.104,4.436 30.099,4.436 30.099,4.441 29.687,4.441 29.687,4.446 29.682,4.446 29.682,4.455 29.687,4.455 29.687,4.69 29.682,4.69 29.682,4.695 29.687,4.695 29.687,4.704 30.894,4.704 30.894,4.441 30.482,4.441 30.482,4.436 30.477,4.436 30.477,3.358 30.104,3.358 30.104,3.9
  region: 396 vertices and 0 holes, not listed, extent 31.076,3.334 32.355,4.699

## Silkscreen, mask and mechanical layers (free items; w line width, h text height)
Flex Stack Top Overlay:
  drawing of 56 lines, arcs and shapes, not listed
  text "-SENSOR" at 48.275,-0.725 h2
  text "V200" at 48.25,-1.825 h1
Flex Stack Top Coverlay:
  drawing of 9 lines, arcs and shapes, not listed
Board Shape:
  lines w0.05: 15.775,2.5 ccw(c15.775,2.5) 15.775,2.5 ; 15.775,2.5 cw(c15.775,3.224) 15.263,2.712 14.74,3.235 ccw(c14.1,2.595) 14.1,3.5 7.5,3.5 0.25,3.5 ccw(c0.259,3.2) -0.041,3.191 -0.041,-3.191 ccw(c0.259,-3.2) 0.25,-3.5 7.5,-3.5 14.1,-3.5 ccw(c14.1,-2.595) 14.74,-3.235 15.263,-2.712 cw(c15.775,-3.224) 15.775,-2.5 58,-2.5 58,2.5 ; 15.775,2.5 28,2.5 ccw(c28,3) 28.5,3 28.5,10.709 cw(c28.8,10.7) 28.809,11 35.709,11 cw(c35.7,10.7) 36,10.691 36,3 ccw(c36.5,3) 36.5,2.5 58,2.5 ; 58,2.5 ccw(c58,2.5) 58,2.5
Assembly Notes:
  lines w0.05: 15.775,2.5 ccw(c15.775,2.5) 15.775,2.5 ; 6.5,3.5 ccw(c6.5,3.5) 6.5,3.5 ; 6.5,3.5 0.25,3.5 ccw(c0.259,3.2) -0.041,3.191 -0.041,-3.191 ccw(c0.259,-3.2) 0.25,-3.5 6.5,-3.5 6.5,3.5 ; 15.775,2.5 cw(c15.775,3.224) 15.504,2.553 15.504,-2.553 cw(c15.775,-3.224) 15.775,-2.5 18.4,-2.5 ; 15.775,2.5 ccw(c15.775,2.5) 15.775,2.5 ; 15.775,2.5 18.4,2.5 18.4,-2.5 ; 18.4,-2.5 ccw(c18.4,-2.5) 18.4,-2.5 ; 35.3,-2.5 ccw(c35.3,-2.5) 35.3,-2.5 ; 35.3,-2.5 38.85,-2.5 38.85,2.5 35.3,2.5 ; 35.3,-2.5 35.3,2.5 ; 35.3,2.5 ccw(c35.3,2.5) 35.3,2.5 ; 7.5,-3.5 7.5,3.5 14.1,3.5 cw(c14.1,2.595) 14.539,3.386 14.539,-3.386 cw(c14.1,-2.595) 14.1,-3.5 7.5,-3.5 ; 19.4,-2.5 25.025,-2.5 25.025,2.5 19.4,2.5 19.4,-2.5 ; 25.8,-2.5 29.7,-2.5 29.7,2.5 25.8,2.5 25.8,-2.5 ; 28.5,4.118 ccw(c29.6,4.118) 29.6,3.018 30.082,3.018 cw(c30.082,2.5) 30.6,2.5 30.6,-2.5 34.4,-2.5 34.4,2.5 cw(c34.9,2.5) 34.9,3 ccw(c34.9,4.1) 36,4.1 36,10.691 ccw(c35.7,10.7) 35.709,11 28.809,11 ccw(c28.8,10.7) 28.5,10.709 28.5,4.118 ; 39.85,-2.5 44,-2.5 44,2.5 39.85,2.5 39.85,-2.5 ; 58,2.5 ccw(c58,2.5) 58,2.5